# EAGLE board Volume Button LED 6 (Two) (EAGLE 7.3.0)
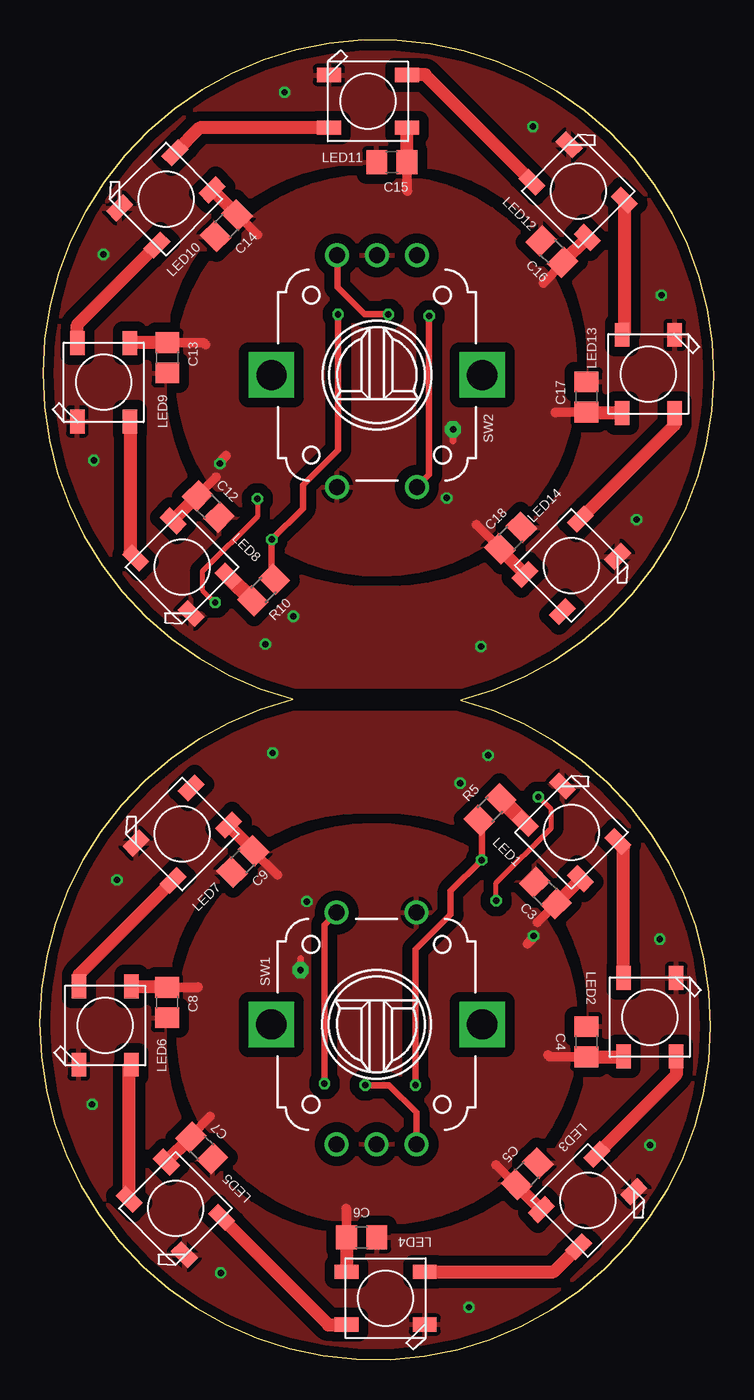
[diagram p0: board, top side]
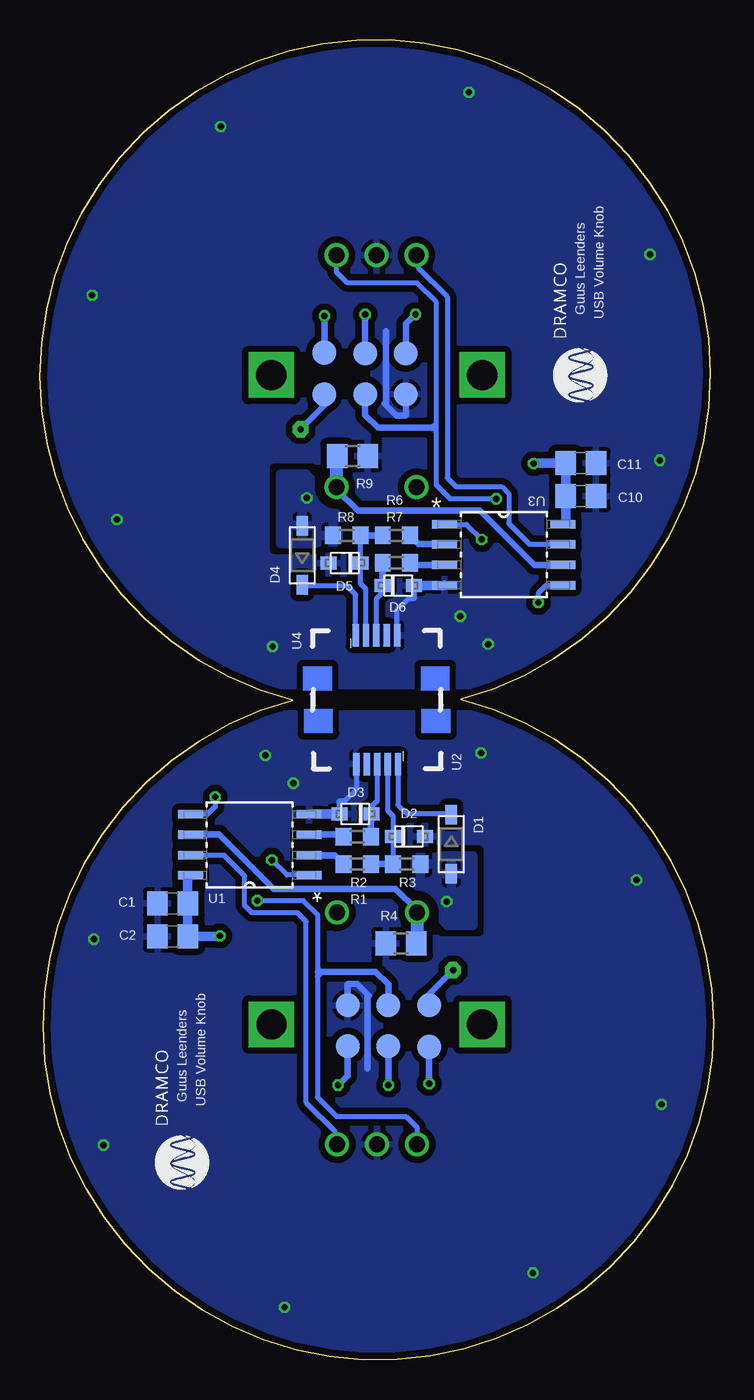
[diagram p1: board, bottom side, seen from below]

Size 42.19 x 82.62 mm. Coordinates in mm from the lower left corner, seen from the top.
Outline: 26.37,41.28 arc-331 15.82,41.33
Outline: 15.82,41.34 arc-331 26.37,41.29
Copper layers (1*16): Top 0.035mm / dielectric 1.5mm / Bottom 0.035mm
Design rules "SeeedStudio_2layer_DRU_no_angle_20140221": minimum track width 6mil, minimum drill 12mil, track to track 6mil, track to pad 6mil, pad to pad 6mil, via to via 6mil, smd to smd 0mil, copper to edge 10mil, drill to drill 10mil, minimum pad ring 10mil, minimum via ring 6mil, stop-mask expansion 2mil, vias tented up to drill 100mil, thermal gap 10mil

## Footprints (pad centres in the part's own frame; a part is rotated, then mirrored left to right if it is on the bottom)
C0805 = smd 1.3 x 1.5: 1 -0.95,0; 2 0.95,0
SOD-123 = smd 1.2 x 0.7: A 1.85,0; C -1.85,0
SOD-323F = smd 1 x 0.8: A -1,0; C 1,0
WS2812B = smd 1.5 x 0.9: 1-VDD 2.45,-1.65; 2-DOUT 2.45,1.65; 3-GND -2.45,1.65; 4-DIN -2.45,-1.65
R0603 = smd 1 x 1.1: 1 -0.85,0; 2 0.85,0
R0805 = smd 1.3 x 1.5: 1 -0.95,0; 2 0.95,0
PEC12_INCREMENTAL_ENCODER = drill 1: A -2.5,-7.5; B 2.5,-7.5; C 0,-7.5; P1 -2.5,7; P2 2.5,7 | drill 1.9 square: GND@1 -6.6,0; GND@2 6.6,0
TP15R = smd 1.5 x 1.5: TP 0,0
SOIC127P798X216-8N = smd 1.549 x 0.533: 1 -3.708,1.905; 2 -3.708,0.635; 3 -3.708,-0.635; 4 -3.708,-1.905; 5 3.708,-1.905; 6 3.708,-0.635; 7 3.708,0.635; 8 3.708,1.905
USB-MICRO-SMD = smd 1.4 x 0.4: D+1 2.7,0; D-1 2.7,0.65; GND1 2.7,-1.3; ID1 2.7,-0.65; VBUS1 2.7,1.3

## Placement (x,y rotation side)
C1  100n  [C0805]  33.88,28.57 180 bottom
C2  10u  [C0805]  33.88,26.5 180 bottom
C3  100n  [C0805]  31.65,29.21 135 top
C4  100n  [C0805]  34.21,19.9 90 top
C5  100n  [C0805]  30.52,11.64 45 top
C6  100n  [C0805]  20.15,7.67 0 top
C7  100n  [C0805]  10.13,13.25 315 top
C8  100n  [C0805]  7.96,22.36 270 top
C9  100n  [C0805]  12.71,31.19 225 top
C10  100n  [C0805]  8.31,54.05 0 bottom
C11  10u  [C0805]  8.31,56.12 0 bottom
C12  100n  [C0805]  10.54,53.41 315 top
C13  100n  [C0805]  7.98,62.72 270 top
C14  100n  [C0805]  11.67,70.98 225 top
C15  100n  [C0805]  22.04,74.95 180 top
C16  100n  [C0805]  32.06,69.37 135 top
C17  100n  [C0805]  34.23,60.26 90 top
C18  100n  [C0805]  29.48,51.43 45 top
D1  [SOD-123]  16.43,32.27 270 bottom
D2  3.6V Zener  [SOD-323F]  19.09,32.75 180 bottom
D3  3.6V Zener  [SOD-323F]  22.44,34.16 0 bottom
D4  [SOD-123]  25.76,50.35 90 bottom
D5  3.6V Zener  [SOD-323F]  23.1,49.87 0 bottom
D6  3.6V Zener  [SOD-323F]  19.75,48.46 180 bottom
LED1  WS2812B5050  [WS2812B]  33.29,33.01 315 top
LED2  WS2812B5050  [WS2812B]  38.2,21.44 270 top
LED3  WS2812B5050  [WS2812B]  34.3,9.96 225 top
LED4  WS2812B5050  [WS2812B]  21.65,3.85 180 top
LED5  WS2812B5050  [WS2812B]  8.48,9.47 135 top
LED6  WS2812B5050  [WS2812B]  4.09,20.92 90 top
LED7  WS2812B5050  [WS2812B]  8.92,32.9 45 top
LED8  WS2812B5050  [WS2812B]  8.9,49.61 135 top
LED9  WS2812B5050  [WS2812B]  3.99,61.18 90 top
LED10  WS2812B5050  [WS2812B]  7.89,72.66 45 top
LED11  WS2812B5050  [WS2812B]  20.54,78.77 0 top
LED12  WS2812B5050  [WS2812B]  33.71,73.15 315 top
LED13  WS2812B5050  [WS2812B]  38.1,61.7 270 top
LED14  WS2812B5050  [WS2812B]  33.28,49.72 225 top
R1  68  [R0603]  22.32,31.03 180 bottom
R2  68  [R0603]  22.32,32.73 180 bottom
R3  1.5k  [R0603]  19.22,31.03 0 bottom
R4  10k  [R0805]  19.58,26.06 0 bottom
R5  330  [R0805]  28.18,34.44 45 top
R6  68  [R0603]  19.87,51.59 0 bottom
R7  68  [R0603]  19.87,49.89 0 bottom
R8  1.5k  [R0603]  22.97,51.59 180 bottom
R9  10k  [R0805]  22.61,56.56 180 bottom
R10  330  [R0805]  14.01,48.18 225 top
SW1  ENCODER_SW1-PEC12  [PEC12_INCREMENTAL_ENCODER]  21.09,20.98 0 top
SW2  ENCODER_SW1-PEC12  [PEC12_INCREMENTAL_ENCODER]  21.11,61.64 180 top
TP1  TPSQTP15R  [TP15R]  17.82,19.58 0 bottom
TP2  TPSQTP15R  [TP15R]  20.37,19.63 0 bottom
TP3  TPSQTP15R  [TP15R]  22.92,19.63 0 bottom
TP4  TPSQTP15R  [TP15R]  17.82,22.18 0 bottom
TP5  TPSQTP15R  [TP15R]  20.37,22.18 0 bottom
TP6  TPSQTP15R  [TP15R]  22.92,22.18 0 bottom
TP7  TPSQTP15R  [TP15R]  24.37,63.04 180 bottom
TP8  TPSQTP15R  [TP15R]  21.82,62.99 180 bottom
TP9  TPSQTP15R  [TP15R]  19.27,62.99 180 bottom
TP10  TPSQTP15R  [TP15R]  24.37,60.44 180 bottom
TP11  TPSQTP15R  [TP15R]  21.82,60.44 180 bottom
TP12  TPSQTP15R  [TP15R]  19.27,60.44 180 bottom
U1  ATTINY85-20SU  [SOIC127P798X216-8N]  29.05,32.23 180 bottom
U2  [USB-MICRO-SMD]  21.07,39.98 270 bottom
U3  ATTINY85-20SU  [SOIC127P798X216-8N]  13.14,50.39 0 bottom
U4  [USB-MICRO-SMD]  21.12,42.64 90 bottom

## Library data of the parts
C1-C18 R1-R10 = rcl
D1-D6 LED1-LED14 = adafruit
SW1 SW2 = dp_devices
TP1-TP12 = testpad
U1 U3 = ATTINY85; MPN: ATTINY85-20SU; OC_FARNELL: 1455164; OC_NEWARK: 58M3797; PACKAGE: SOIC-8; SUPPLIER: Atmel
U2 U4 = MicroUSB

## Nets
+5V: C1.1 C2.1 C3.1 C4.1 C5.1 C6.1 C7.1 C8.1 C9.1 D1.A LED1.1-VDD LED2.1-VDD LED3.1-VDD LED4.1-VDD LED5.1-VDD LED6.1-VDD LED7.1-VDD R3.2 SW1.P2 TP4.TP U1.8
+5V1: C10.1 C11.1 C12.1 C13.1 C14.1 C15.1 C16.1 C17.1 C18.1 D4.A LED8.1-VDD LED9.1-VDD LED10.1-VDD LED11.1-VDD LED12.1-VDD LED13.1-VDD LED14.1-VDD R8.2 SW2.P2 TP10.TP U3.8
BUTTON: R4.2 SW1.P1 TP1.TP U1.6
BUTTON1: R9.2 SW2.P1 TP7.TP U3.6
GND: C1.2 C2.2 C3.2 C4.2 C5.2 C6.2 C7.2 C8.2 C9.2 D2.A D3.A LED1.3-GND LED2.3-GND LED3.3-GND LED4.3-GND LED5.3-GND LED6.3-GND LED7.3-GND R4.1 SW1.C TP6.TP U1.4 U2.GND1
GND1: C10.2 C11.2 C12.2 C13.2 C14.2 C15.2 C16.2 C17.2 C18.2 D5.A D6.A LED8.3-GND LED9.3-GND LED10.3-GND LED11.3-GND LED12.3-GND LED13.3-GND LED14.3-GND R9.1 SW2.C TP12.TP U3.4 U4.GND1
LED: R5.1 TP3.TP U1.1
LED1: R10.1 TP9.TP U3.1
MOSI: SW1.A TP5.TP U1.5
MOSI1: SW2.A TP11.TP U3.5
N$1: LED1.2-DOUT LED2.4-DIN
N$2: D1.C U2.VBUS1
N$3: D2.C R1.1 R3.1 U2.D-1
N$4: D3.C R2.1 U2.D+1
N$5: LED1.4-DIN R5.2
N$6: D4.C U4.VBUS1
N$7: LED2.2-DOUT LED3.4-DIN
N$8: LED3.2-DOUT LED4.4-DIN
N$9: LED4.2-DOUT LED5.4-DIN
N$10: LED5.2-DOUT LED6.4-DIN
N$11: D5.C R6.1 R8.1 U4.D-1
N$12: LED6.2-DOUT LED7.4-DIN
N$13: D6.C R7.1 U4.D+1
N$14: LED8.2-DOUT LED9.4-DIN
N$15: LED9.2-DOUT LED10.4-DIN
N$16: LED10.2-DOUT LED11.4-DIN
N$17: LED11.2-DOUT LED12.4-DIN
N$18: LED12.2-DOUT LED13.4-DIN
N$19: LED13.2-DOUT LED14.4-DIN
N$20: LED8.4-DIN R10.2
SCK: SW1.B TP2.TP U1.7
SCK1: SW2.B TP8.TP U3.7
USB+: R2.2 U1.3
USB+1: R7.2 U3.3
USB-: R1.2 U1.2
USB-1: R6.2 U3.2

## Tracks (layer width: path | path; a pad name or v marks a point on that pad's centre or on a via)
+5V  (via drill 0.4 pad 0.41, 0.4 pad 1.02)
  Top 0.406: v16.32,24.38 16.32,25.13
  Top 0.61: v30.92,26.53 30.92,26.43 30.52,26.03 | C3.1 31.17,27.38 | C4.1 31.95,18.95 31.82,19.08 | C5.1 29.78,10.96 28.57,12.18 | C6.1 19.2,9.45 19.17,9.48 | C7.1 9.46,14.02 10.67,15.23 | C8.1 9.9,23.31 9.92,23.33 | C9.1 13.38,31.81 14.87,30.33
  Top 0.813: LED7.1-VDD 11.81,33.43 C9.1 | LED6.1-VDD 7.9,23.37 C8.1 | LED5.1-VDD 7.92,12.39 C7.1 | C6.1 LED4.1-VDD | C5.1 29.85,10.95 LED3.1-VDD | C4.1 36.51,18.95 LED2.1-VDD | LED1.1-VDD 33.86,30.07 C3.1
  Bottom 0.406: TP4.TP 17.82,22.88 v16.32,24.38
  Bottom 0.61: 32.76,28.74 C1.1 | C1.1 C2.1 30.95,26.5 v30.92,26.53 | C1.1 32.93,30.15 U1.8
  Bottom 0.813: C1.1
  other vias: 16.72,28.68
  pour Bottom (isolate 0.61): 15.07,31.53 15.07,27.18 16.67,27.18 19.07,29.58 19.07,31.53
  pour Top (isolate 0.61): 20.77,33.48 arc-90 33.57,20.93 33.57,19.93 arc-90 20.62,8.58 20.07,8.58 arc-90 8.72,20.93 8.72,21.28 arc-90
+5V1  (via drill 0.4 pad 0.41, 0.4 pad 1.02)
  Top 0.406: v25.87,58.24 25.87,57.49
  Top 0.61: v11.27,56.09 11.27,56.19 11.67,56.59 | C12.1 11.02,55.24 | C13.1 10.24,63.67 10.37,63.54 | C14.1 12.41,71.66 13.62,70.44 | C15.1 22.99,73.17 23.02,73.14 | C16.1 32.73,68.6 31.52,67.39 | C17.1 32.29,59.31 32.27,59.29 | C18.1 28.81,50.81 27.32,52.29
  Top 0.813: LED14.1-VDD 30.38,49.19 C18.1 | LED13.1-VDD 34.29,59.25 C17.1 | LED12.1-VDD 34.27,70.23 C16.1 | C15.1 LED11.1-VDD | C14.1 12.35,71.67 LED10.1-VDD | C13.1 5.68,63.67 LED9.1-VDD | LED8.1-VDD 8.33,52.55 C12.1
  Bottom 0.406: TP10.TP 24.37,59.74 v25.87,58.24
  Bottom 0.61: 9.43,53.88 C10.1 | C10.1 C11.1 11.24,56.12 v11.27,56.09 | C10.1 9.26,52.47 U3.8
  Bottom 0.813: 9.27,54.04 C10.1
  other vias: 25.47,53.94
  pour Bottom (isolate 0.61): 27.12,51.09 27.12,55.44 25.52,55.44 23.12,53.04 23.12,51.09
  pour Top (isolate 0.61): 21.42,49.14 arc-90 8.62,61.69 8.62,62.69 arc-90 21.57,74.04 22.12,74.04 arc-90 33.47,61.69 33.47,61.34 arc-90
BUTTON  (via drill 0.4 pad 0.41)
  Top 0.406: v17.82,17.28 17.82,27.22 SW1.P1
  Bottom 0.406: TP1.TP v17.82,17.28 | SW1.P1 18.59,28.14 19.92,29.48 27.57,29.48 30.97,32.88 32.74,32.88 U1.6
  Bottom 0.813: SW1.P1 18.59,26.1 R4.2
BUTTON1  (via drill 0.4 pad 0.41)
  Top 0.406: v24.37,65.34 24.37,55.4 SW2.P1
  Bottom 0.406: TP7.TP v24.37,65.34 | SW2.P1 23.61,54.48 22.27,53.14 14.62,53.14 11.22,49.74 9.45,49.74 U3.6
  Bottom 0.813: SW2.P1 23.61,56.52 R9.2
GND  (via drill 0.4 pad 0.41)
  Bottom 0.305: U2.GND1 22.37,35.68 23.07,34.98 23.42,34.98 23.47,34.93 23.47,34.19 D3.A
  Bottom 0.406: TP6.TP 22.92,23.48 22.87,23.53 22.32,23.53 21.57,22.78 21.67,22.68 21.67,18.23
  Bottom 0.61: D3.A 25.32,34.16 U1.4
  other vias: 4.82,30.03 3.27,15.98 11.32,5.43 26.87,3.28 38.22,13.43 38.82,26.33 14.57,37.98 28.07,37.83 26.32,36.08
  pour Bottom (isolate 0.406, rank 6): -0.93,40.44 -0.93,-1.02 43.07,-1.02 43.07,40.44
  pour Top (isolate 0.61, rank 6): -0.93,40.44 -0.93,-1.02 43.07,-1.02 43.07,40.44
GND1  (via drill 0.4 pad 0.41)
  Bottom 0.305: U4.GND1 19.82,46.94 19.12,47.64 18.77,47.64 18.72,47.69 18.72,48.43 D6.A
  Bottom 0.406: TP12.TP 19.27,59.14 19.32,59.09 19.87,59.09 20.62,59.84 20.52,59.94 20.52,64.39
  Bottom 0.61: D6.A 16.88,48.46 U3.4
  other vias: 37.37,52.59 38.92,66.64 30.87,77.19 15.32,79.34 3.97,69.19 3.37,56.29 27.62,44.64 14.12,44.79 15.87,46.54
  pour Bottom (isolate 0.406, rank 6): 43.12,42.18 43.12,83.64 -0.88,83.64 -0.88,42.18
  pour Top (isolate 0.61, rank 6): 43.12,42.18 43.12,83.64 -0.88,83.64 -0.88,42.18
LED  (via drill 0.4 pad 0.41)
  Top 0.406: v23.52,17.18 23.52,25.68 25.72,27.88 25.72,29.33 v27.67,31.28 27.67,33.61 R5.1
  Bottom 0.305: U1.1 26.72,30.33 v27.67,31.28
  Bottom 0.406: U1.1 | TP3.TP 22.92,17.78 v23.52,17.18
LED1  (via drill 0.4 pad 0.41)
  Top 0.406: v18.67,65.44 18.67,56.94 16.47,54.74 16.47,53.29 v14.52,51.34 14.52,49.01 R10.1
  Bottom 0.305: U3.1 15.47,52.29 v14.52,51.34
  Bottom 0.406: U3.1 | TP9.TP 19.27,64.84 v18.67,65.44
MOSI  (via drill 0.4 pad 0.41)
  Top 0.305: v28.57,28.73 28.57,29.83 32.02,33.28 32.02,34.43 v31.22,35.23
  Bottom 0.305: 24.82,23.98 24.82,27.88 25.67,28.73 v28.57,28.73 | 24.82,23.98 24.82,16.43 23.62,15.23 19.27,15.23 18.57,14.53 18.57,13.5 SW1.A | 24.52,24.28 24.82,23.98 | v31.22,35.23 31.22,34.63 31.72,34.13 U1.5
  Bottom 0.406: TP5.TP 20.37,23.48 21.17,24.28 24.52,24.28 24.77,24.28
  pour Bottom: 24.52,24.28 24.82,24.58 24.82,23.98
MOSI1  (via drill 0.4 pad 0.41)
  Top 0.305: v13.62,53.89 13.62,52.79 10.17,49.34 10.17,48.19 v10.97,47.39
  Bottom 0.305: 17.37,58.64 17.37,54.74 16.52,53.89 v13.62,53.89 | 17.37,58.64 17.37,66.19 18.57,67.39 22.92,67.39 23.62,68.09 23.62,69.12 SW2.A | 17.67,58.34 17.37,58.64 | v10.97,47.39 10.97,47.99 10.47,48.49 U3.5
  Bottom 0.406: TP11.TP 21.82,59.14 21.02,58.34 17.67,58.34 17.42,58.34
  pour Bottom: 17.67,58.34 17.37,58.04 17.37,58.64
N$1
  Top 0.813: LED2.4-DIN 36.55,32.08 LED1.2-DOUT
N$2
  Bottom 0.305: D1.C 16.49,34.18 19.22,34.18 19.77,34.73 U2.VBUS1
N$3
  Bottom 0.305: R3.1 20.09,31.05 D2.C 20.07,32.92 20.07,34.03 20.42,34.38 U2.D-1
  Bottom 0.406: R3.1 R1.1
N$4
  Bottom 0.305: D3.C 21.37,34.23 21.37,34.68 21.07,34.98 U2.D+1
  Bottom 0.406: D3.C 21.47,34.16 R2.1
N$5
  Top 0.305: R5.2
  Top 1.016: R5.2 LED1.4-DIN
N$6
  Bottom 0.305: D4.C 25.7,48.44 22.97,48.44 22.42,47.89 U4.VBUS1
N$7
  Top 0.813: LED2.2-DOUT 39.85,17.84 LED3.4-DIN
N$8
  Top 0.813: LED4.4-DIN 32.18,5.5 LED3.2-DOUT
N$9
  Top 0.813: LED5.4-DIN 11.38,8.86 18.07,2.18 19.18,2.18 LED4.2-DOUT
N$10
  Top 0.813: LED5.2-DOUT 5.59,18.31 LED6.4-DIN
N$11
  Bottom 0.305: R8.1 22.1,51.57 D5.C 22.12,49.7 22.12,48.59 21.77,48.24 U4.D-1
  Bottom 0.406: R8.1 R6.1
N$12
  Top 0.813: LED6.2-DOUT 2.44,24.09 LED7.4-DIN
N$13
  Bottom 0.305: D6.C 20.82,48.39 20.82,47.94 21.12,47.64 U4.D+1
  Bottom 0.406: D6.C 20.72,48.46 R7.1
N$14
  Top 0.813: LED9.4-DIN 5.64,50.54 LED8.2-DOUT
N$15
  Top 0.813: LED9.2-DOUT 2.34,64.78 LED10.4-DIN
N$16
  Top 0.813: LED11.4-DIN 10.01,77.12 LED10.2-DOUT
N$17
  Top 0.813: LED12.4-DIN 30.81,73.76 24.12,80.44 23.01,80.44 LED11.2-DOUT
N$18
  Top 0.813: LED12.2-DOUT 36.61,64.31 LED13.4-DIN
N$19
  Top 0.813: LED13.2-DOUT 39.75,58.53 LED14.4-DIN
N$20
  Top 0.305: R10.2
  Top 1.016: R10.2 LED8.4-DIN
SCK  (via drill 0.4 pad 0.41)
  Top 0.406: v20.37,17.18 21.87,17.18 23.57,15.48 23.57,13.5 SW1.B
  Bottom 0.305: U1.7 30.68,31.59 29.37,30.28 29.37,28.43 28.92,27.98 26.07,27.98 25.52,27.43 25.52,16.08 23.72,14.28 23.72,13.62 SW1.B 23.57,13.5
  Bottom 0.406: TP2.TP v20.37,17.18
SCK1  (via drill 0.4 pad 0.41)
  Top 0.406: v21.82,65.44 20.32,65.44 18.62,67.14 18.62,69.12 SW2.B
  Bottom 0.305: U3.7 11.51,51.03 12.82,52.34 12.82,54.19 13.27,54.64 16.12,54.64 16.67,55.19 16.67,66.54 18.47,68.34 18.47,69 SW2.B 18.62,69.12
  Bottom 0.406: TP8.TP v21.82,65.44
USB+
  Bottom 0.305: 25.33,32.88 U1.3
  Bottom 0.406: U1.3 23.17,32.86 R2.2
USB+1
  Bottom 0.305: 16.87,49.74 U3.3
  Bottom 0.406: U3.3 19.02,49.76 R7.2
USB-
  Bottom 0.305: 25.33,31.58 U1.2
  Bottom 0.406: 25.33,31.58 23.72,31.58 R1.2
USB-1
  Bottom 0.305: 16.87,51.04 U3.2
  Bottom 0.406: 16.87,51.04 18.47,51.04 R6.2

## Text on the board
bNames: USB Volume Knob | Guus Leenders | USB Volume Knob | Guus Leenders